# EAGLE board Spo2 PCB Layout (EAGLE 9.6.2)
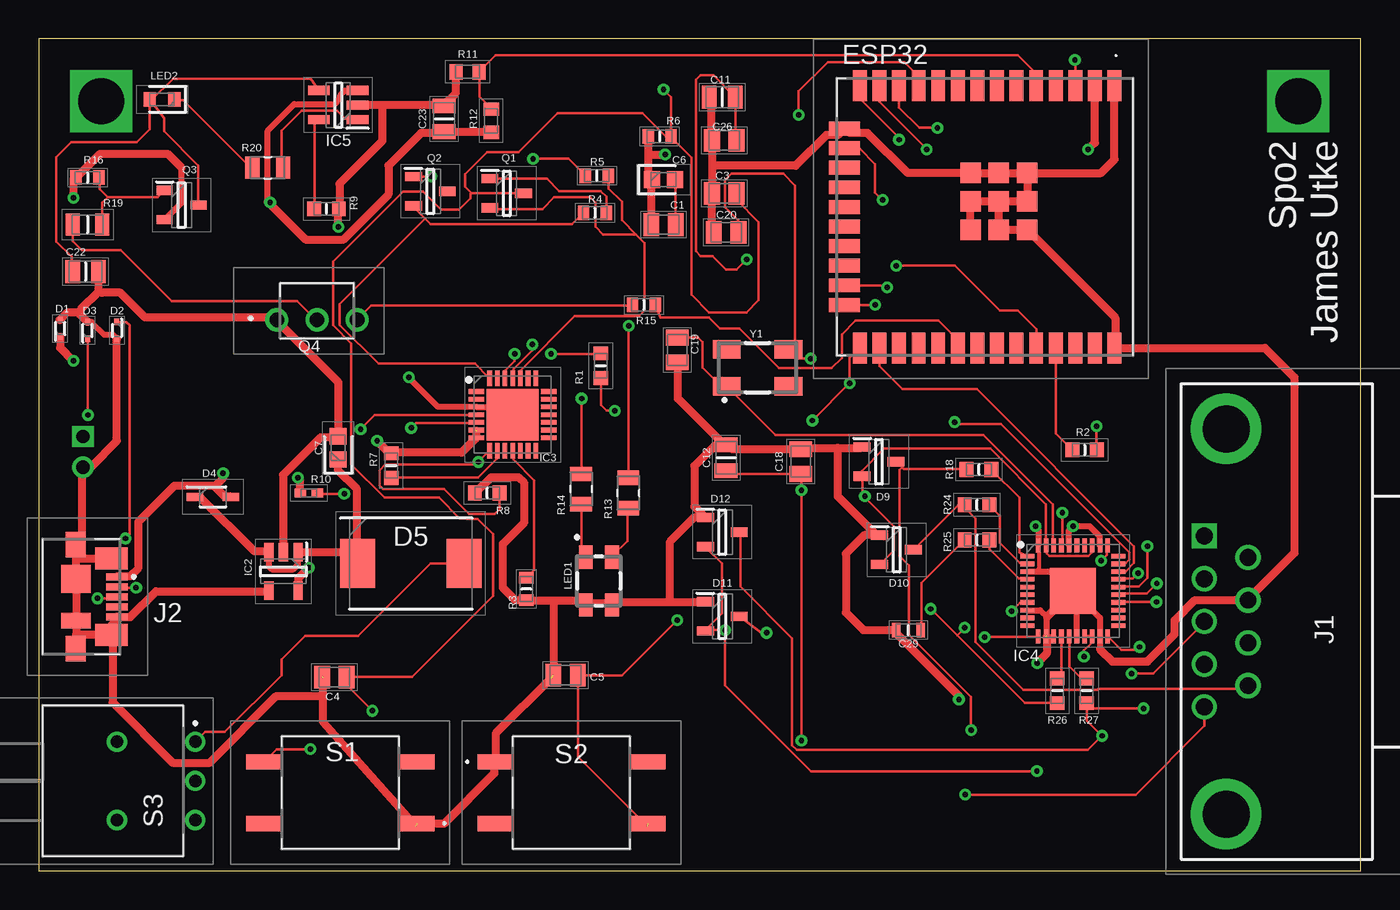
[diagram p0: board, top side]
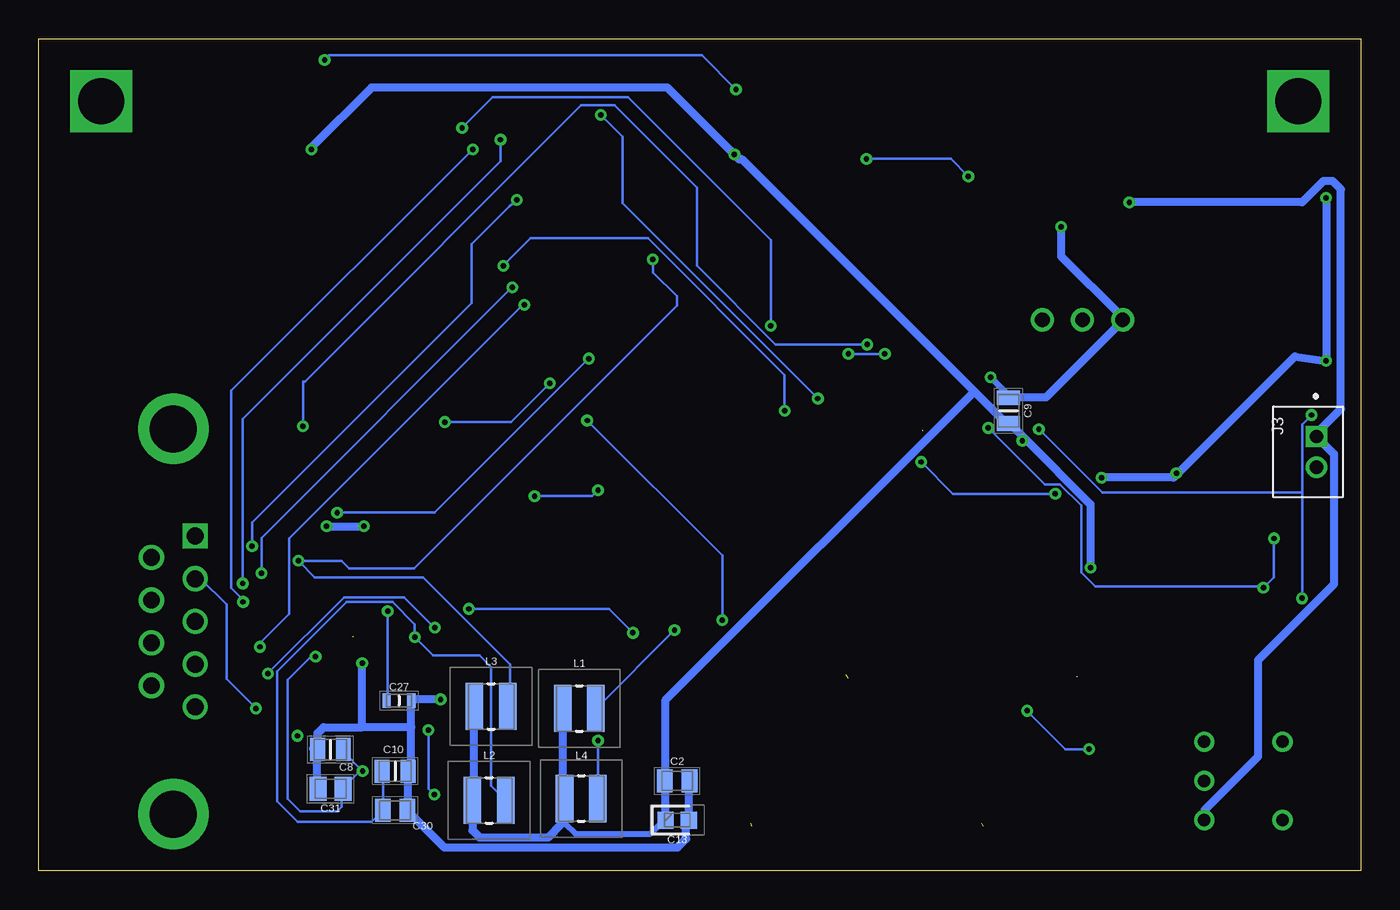
[diagram p1: board, bottom side, seen from below]

Size 85.72 x 53.98 mm. Coordinates in mm from the lower left corner, seen from the top.
Outline: 0,0 85.72,0 85.72,53.98 0,53.98 0,0
Copper layers (1*16): Top 0.035mm / dielectric 1.5mm / Bottom 0.035mm
Design rules "default": minimum track width 6mil, minimum drill 0.35mm, track to track 6mil, track to pad 6mil, pad to pad 6mil, via to via 6mil, smd to smd 6mil, copper to edge 40mil, drill to drill 6mil, minimum pad ring 10mil, minimum via ring 8mil, stop-mask expansion 4mil, vias tented up to drill 0mil, thermal gap 10mil
Net classes: 0 default: width 0.152 mm; 1 Power: width 0.508 mm

## Footprints (pad centres in the part's own frame; a part is rotated, then mirrored left to right if it is on the bottom)
CAPC2012X88N = smd 1.02 x 1.47: 1 -0.8,0; 2 0.8,0
CAPPC1609X90N = smd 1.05 x 1.1: 1 -0.75,0; 2 0.75,0
CAPC2114X145N@1 = smd 0.96 x 1.49: 1 -0.84,0; 2 0.84,0
CAPC2114X145N = smd 0.96 x 1.49: 1 -0.84,0; 2 0.84,0
CAPC2012X88N@1 = smd 1.02 x 1.47: 1 -0.8,0; 2 0.8,0
CAPC1608X80N = smd 0.54 x 0.94: 1 -0.8,0; 2 0.8,0
CAPC2012X100N = smd 1.1 x 1.57: 1 -0.81,0; 2 0.81,0
SODFL1006X40N = smd 0.43 x 0.32: 1 -0.55,0; 2 0.55,0
SOD2513X120N = smd 1.075 x 0.5: 1 -1.162,0; 2 1.162,0
DIOM8059X256N = smd 2.25 x 3.2: 1 -3.45,0; 2 3.45,0
SOT95P240X110-3N = smd 1.1 x 0.6: 1 -1.1,0.95; 2 -1.1,-0.95; 3 1.1,0
ESP32WROOM32DM113DH2800PH3Q0 = smd 2 x 0.9: 1 -8.5,8.41; 2 -8.5,7.14; 3 -8.5,5.87; 4 -8.5,4.6; 5 -8.5,3.33; 6 -8.5,2.06; 7 -8.5,0.79; 8 -8.5,-0.48; 9 -8.5,-1.75; 10 -8.5,-3.02; 11 -8.5,-4.29; 12 -8.5,-5.56; 13 -8.5,-6.83; 14 -8.5,-8.1; 25 8.5,-8.1; 26 8.5,-6.83; 27 8.5,-5.56; 28 8.5,-4.29; 29 8.5,-3.02; 30 8.5,-1.75; 31 8.5,-0.48; 32 8.5,0.79; 33 8.5,2.06; 34 8.5,3.33; 35 8.5,4.6; 36 8.5,5.87; 37 8.5,7.14; 38 8.5,8.41 | smd 0.9 x 2: 15 -5.715,-9.1; 16 -4.445,-9.1; 17 -3.175,-9.1; 18 -1.905,-9.1; 19 -0.635,-9.1; 20 0.635,-9.1; 21 1.905,-9.1; 22 3.175,-9.1; 23 4.445,-9.1; 24 5.715,-9.1 | smd 1.33 x 1.33: 39 -2.835,2.745; 40 -1,2.745; 41 0.835,2.745; 42 -2.835,0.91; 43 -1,0.91; 44 0.835,0.91; 45 -2.835,-0.925; 46 -1,-0.925; 47 0.835,-0.925
SOT95P282X130-5N = smd 1.2 x 0.6: 1 -1.25,0.95; 2 -1.25,0; 3 -1.25,-0.95; 4 1.25,-0.95; 5 1.25,0.95
QFN50P500X500X80-29N = smd 1 x 0.3: 1 -2.35,1.5; 2 -2.35,1; 3 -2.35,0.5; 4 -2.35,0; 5 -2.35,-0.5; 6 -2.35,-1; 7 -2.35,-1.5; 15 2.35,-1.5; 16 2.35,-1; 17 2.35,-0.5; 18 2.35,0; 19 2.35,0.5; 20 2.35,1; 21 2.35,1.5 | smd 0.3 x 1: 8 -1.5,-2.35; 9 -1,-2.35; 10 -0.5,-2.35; 11 0,-2.35; 12 0.5,-2.35; 13 1,-2.35; 14 1.5,-2.35; 22 1.5,2.35; 23 1,2.35; 24 0.5,2.35; 25 0,2.35; 26 -0.5,2.35; 27 -1,2.35; 28 -1.5,2.35 | smd 3.35 x 3.35: 29 0,0
QFN50P600X600X100-41N = smd 0.9 x 0.3: 1 -2.95,2.25; 2 -2.95,1.75; 3 -2.95,1.25; 4 -2.95,0.75; 5 -2.95,0.25; 6 -2.95,-0.25; 7 -2.95,-0.75; 8 -2.95,-1.25; 9 -2.95,-1.75; 10 -2.95,-2.25; 21 2.95,-2.25; 22 2.95,-1.75; 23 2.95,-1.25; 24 2.95,-0.75; 25 2.95,-0.25; 26 2.95,0.25; 27 2.95,0.75; 28 2.95,1.25; 29 2.95,1.75; 30 2.95,2.25 | smd 0.3 x 0.9: 11 -2.25,-2.95; 12 -1.75,-2.95; 13 -1.25,-2.95; 14 -0.75,-2.95; 15 -0.25,-2.95; 16 0.25,-2.95; 17 0.75,-2.95; 18 1.25,-2.95; 19 1.75,-2.95; 20 2.25,-2.95; 31 2.25,2.95; 32 1.75,2.95; 33 1.25,2.95; 34 0.75,2.95; 35 0.25,2.95; 36 -0.25,2.95; 37 -0.75,2.95; 38 -1.25,2.95; 39 -1.75,2.95; 40 -2.25,2.95 | smd 3 x 3: 41 0,0
SOT95P270X145-5N = smd 1.4 x 0.6: 1 -1.25,0.95; 2 -1.25,0; 3 -1.25,-0.95; 4 1.25,-0.95; 5 1.25,0.95
182009213R161 = drill 1.09 pad 1.635 square: 1 0,0 | drill 1.09 pad 1.635: 2 -2.77,0; 3 -5.54,0; 4 -8.31,0; 5 -11.08,0; 6 -1.385,-2.84; 7 -4.155,-2.84; 8 -6.925,-2.84; 9 -9.695,-2.84 | drill 3.05 pad 4.575: MH1 6.955,-1.42; MH2 -18.035,-1.42
473461001 = smd 0.45 x 1.38: 1 -1.3,1.903; 2 -0.65,1.903; 3 0,1.903; 4 0.65,1.903; 5 1.3,1.903 | smd 1.425 x 2.1: 6 2.487,1.544; 7 -2.487,1.544 | smd 1.8 x 1.9: 8 -1.15,-0.756 | smd 1 x 1.9: 9 1.55,-0.756 | smd 1.65 x 1.3: 10 -3.375,-0.756; 11 3.375,-0.756
JST_B2B-PH-K-S(LF)(SN) = drill 0.86 square: 1 1,-0.55 | drill 0.86: 2 -1,-0.55
LPS3010471MRC = smd 1.14 x 3.05: 1 -1.08,0; 2 1.08,0
SMD3528_1 = smd 1.5 x 0.9: 1 -1.55,-0.85; 2 -1.55,0.85; 3 1.55,-0.85; 4 1.55,0.85
LEDC1608X45N = smd 0.8 x 0.95: 1 -0.8,0; 2 0.8,0
SOT95P240X115-3N = smd 1.1 x 0.6: 1 -1.1,0.95; 2 -1.1,-0.95; 3 1.1,0
SOT95P230X110-3N = smd 1.05 x 0.6: 1 -1.1,0.95; 2 -1.1,-0.95; 3 1.1,0
BC33740TA = drill 0.96 pad 1.493: 1 -1.7,-0.585; 2 0.9,-0.585; 3 3.5,-0.585
RESC1608X55N = smd 0.9 x 0.95: 1 -0.8,0; 2 0.8,0
CAPC1608X55N = smd 0.74 x 0.94: 1 -0.74,0; 2 0.74,0
RESC1005X40N = smd 0.75 x 0.6: 1 -0.55,0; 2 0.55,0
RESC1608X50N = smd 0.85 x 1: 1 -0.75,0; 2 0.75,0
RESC2012X64N = smd 0.93 x 1.42: 1 -0.979,0; 2 0.979,0
RESC2012X60N = smd 0.9 x 1.45: 1 -0.95,0; 2 0.95,0
RESC2012X50N = smd 0.92 x 1.42: 1 -1,0; 2 1,0
15712943 = smd 2.2 x 1: 1 -5,2; 2 5,2; 3 -5,-2; 4 5,-2
AS11CH = drill 0.8 pad 1.3: 1 0,0; 2 2.54,0; 3 5.08,0; MH1 0,-5.08; MH2 5.08,-5.08
ABM3B = smd 1.8 x 1.2: 1 -2,-1.2; 2 2,-1.2; 3 2,1.2; 4 -2,1.2

## Placement (x,y rotation side)
C1  0.1uF  [CAPC2012X88N]  40.51,41.91 0 top
C2  0.1uF  [CAPC2012X88N]  44.32,5.84 0 bottom
C3  0.1uF  [CAPC2012X88N]  44.45,43.94 180 top
C4  0.1uF  [CAPC2012X88N]  19.18,12.57 180 top
C5  0.1uF  [CAPC2012X88N]  34.16,12.7 180 top
C6  22uF  [CAPPC1609X90N]  40.51,44.83 0 top
C7  22uF  [CAPPC1609X90N]  19.43,27.43 90 top
C8  10uF  [CAPC2114X145N@1]  66.8,7.87 180 bottom
C9  4.7uF  [CAPC2114X145N]  22.86,29.84 90 bottom
C10  10uF  [CAPC2114X145N@1]  62.61,6.48 0 bottom
C11  10uF  [CAPC2114X145N@1]  44.32,50.16 180 top
C12  10uF  [CAPC2114X145N@1]  44.58,26.8 90 top
C13  22uF  [CAPPC1609X90N]  44.32,3.3 0 bottom
C18  0.1uF  [CAPC2012X88N]  49.4,26.54 90 top
C19  22pF  [CAPC2012X88N@1]  41.4,33.78 270 top
C20  22pF  [CAPC2012X88N@1]  44.58,41.4 180 top
C22  4.7uF  [CAPC2114X145N]  3.05,38.86 0 top
C23  4.7uF  [CAPC2114X145N]  26.29,48.77 90 top
C26  0.1uF  [CAPC2012X88N]  44.45,47.37 180 top
C27  2.2uF  [CAPC1608X80N]  62.36,11.05 0 bottom
C29  2.2uF  [CAPC1608X80N]  56.39,15.62 180 top
C30  0.1uF  [CAPC2012X88N]  62.61,3.94 0 bottom
C31  1uF  [CAPC2012X100N]  66.8,5.33 180 bottom
D1  CPDQ5V0-HF  [SODFL1006X40N]  1.4,35.18 90 top
D2  CPDQ5V0-HF  [SODFL1006X40N]  5.08,35.05 270 top
D3  CPDQ5V0-HF  [SODFL1006X40N]  3.17,35.05 90 top
D4  BAT760-7  [SOD2513X120N]  11.3,24.26 0 top
D5  SS34  [DIOM8059X256N]  24.13,19.94 0 top
D9  BAT54S  [SOT95P240X110-3N]  54.48,26.54 0 top
D10  BAT54S  [SOT95P240X110-3N]  55.63,20.83 0 top
D11  BAT54S  [SOT95P240X110-3N]  44.32,16.51 0 top
D12  BAT54S  [SOT95P240X110-3N]  44.32,21.97 0 top
ESP32  ESP32-WROOM-32D_M113DH2800PH3Q  [ESP32WROOM32DM113DH2800PH3Q0]  61.34,42.42 270 top
IC2  AP2112K-3.3TRG1  [SOT95P282X130-5N]  15.88,19.43 270 top
IC3  CP2102N-A02-GQFN28  [QFN50P500X500X80-29N]  30.73,29.59 0 top
IC4  AFE4400RHAR  [QFN50P600X600X100-41N]  67.06,18.16 0 top
IC5  MCP73832T-2DFI_OT  [SOT95P270X145-5N]  19.43,49.66 180 top
J1  182-009-213R161  [182009213R161]  75.56,21.72 90 top
J2  47346-1001  [473461001]  3.17,17.78 270 top
J3  B2B-PH-K-S(LF)(SN)  [JST_B2B-PH-K-S(LF)(SN)]  3.43,27.18 90 bottom
L1  470nH  [LPS3010471MRC]  50.67,10.54 0 bottom
L2  470nH  [LPS3010471MRC]  56.52,4.57 0 bottom
L3  470nH  [LPS3010471MRC]  56.39,10.67 0 bottom
L4  470nH  [LPS3010471MRC]  50.55,4.7 0 bottom
LED1  150141RV73100  [SMD3528_1]  36.32,18.8 270 top
LED2  LTST-C193KRKT-5A  [LEDC1608X45N]  8,50.04 180 top
Q1  SS8050-G  [SOT95P240X115-3N]  30.35,43.94 0 top
Q2  SS8050-G  [SOT95P240X115-3N]  25.4,44.07 0 top
Q3  BSH205G2R  [SOT95P230X110-3N]  9.27,43.18 0 top
Q4  KSC1815YTA  [BC33740TA]  17.14,36.32 0 top
R1  0 Ohm  [RESC1608X55N]  36.45,32.77 90 top
R2  0 Ohm  [RESC1608X55N]  67.82,27.3 0 top
R3  10k  [CAPC1608X55N]  31.62,18.29 270 top
R4  10k  [CAPC1608X55N]  36.07,42.67 0 top
R5  10k  [CAPC1608X55N]  36.2,45.09 180 top
R6  10k  [CAPC1608X55N]  40.26,47.62 0 top
R7  2k  [RESC1608X55N]  22.86,26.29 90 top
R8  47.5K  [RESC1608X55N]  29.08,24.51 180 top
R9  2k  [RESC1608X55N]  18.67,42.93 180 top
R10  22.1K  [RESC1005X40N]  17.53,24.51 0 top
R11  100k  [RESC1608X50N]  27.81,51.82 180 top
R12  100k  [RESC1608X50N]  29.34,48.64 270 top
R13  65ohm  [RESC2012X64N]  38.23,24.51 90 top
R14  65ohm  [RESC2012X64N]  35.18,24.77 90 top
R15  10k  [CAPC1608X55N]  39.24,36.7 0 top
R16  10k  [CAPC1608X55N]  3.17,44.96 0 top
R18  0 Ohm  [RESC1608X55N]  60.96,26.04 180 top
R19  15k  [RESC2012X60N]  3.17,41.91 0 top
R20  576  [RESC2012X50N]  14.86,45.59 0 top
R24  0 Ohm  [RESC1608X55N]  60.83,23.75 180 top
R25  0 Ohm  [RESC1608X55N]  60.83,21.46 180 top
R26  0 Ohm  [RESC1608X55N]  66.04,11.68 270 top
R27  0 Ohm  [RESC1608X55N]  67.94,11.68 270 top
S1  1571294-3  [15712943]  19.56,5.08 180 top
S2  1571294-3  [15712943]  34.54,5.08 0 top
S3  AS11CH  [AS11CH]  10.16,8.38 270 top
Y1  ABM3B-8.000MHZ-10-1-U-T  [ABM3B]  46.61,32.64 0 top

## Library data of the parts
C1-C5 C18 C26 C30 = SamacSys_Parts; DESCRIPTION: Cap Ceramic 0.1uF 50V X7R 10% Pad SMD 0805 125C T/R; HEIGHT: 0.88mm; MANUFACTURER_NAME: Kemet; MANUFACTURER_PART_NUMBER: C0805C104K5RAC7411; MOUSER_PART_NUMBER: 80-C0805C104K5RACLR; MOUSER_PRICE-STOCK: https://www.mouser.co.uk/ProductDetail/KEMET/C0805C104K5RAC7411/?qs=jbRM9o5BbzPcVXF0wW9AYg%3D%3D
C6 C7 C13 = SamacSys_Parts; DESCRIPTION: 22uF F38 Series Conductive Polymer, Miniature, Undertab Solid Electrolytic Chip Capacitors; HEIGHT: 0.9mm; MANUFACTURER_NAME: AVX; MANUFACTURER_PART_NUMBER: F381A226MMAAXE; MOUSER_PART_NUMBER: 581-F381A226MMAAXE; MOUSER_PRICE-STOCK: https://www.mouser.co.uk/ProductDetail/AVX/F381A226MMAAXE?qs=gTYE2QTfZfQFi8JvXKXiKg%3D%3D
C8 C10-C12 = SamacSys_Parts; DESCRIPTION: Status Mass Production (Preferred) Capacitance 10 uF +/- 10 % Case Size (EIA/JIS) 0805/2012 Rated Voltage 25 V tan (max) 10 % Temperature Characteristic (EIA) X6S Operating Temp. Range (EIA) -55 to +105 High Temperature Loading (% Rated Voltage) 150 % Insulation Resistance (min) 100 MuF Dimension L 2.0 +0.20/-0.00 mm Dimension W 1.25 +0.20/-0.00 mm Dimension T 1.25 +0.20/-0.00 mm Dimension e 0.50 +/-0.25 mm RoHS Compliance (10 subst.) Yes REACH Compliance (205 subst.) Yes IEC62474 (Ver. D19; HEIGHT: 1.45mm; MANUFACTURER_NAME: TAIYO YUDEN; MANUFACTURER_PART_NUMBER: TMK212BC6106KG-T; MOUSER_PART_NUMBER: 963-TMK212BC6106KG-T; MOUSER_PRICE-STOCK: https://www.mouser.co.uk/ProductDetail/Taiyo-Yuden/TMK212BC6106KG-T/?qs=rI7uf1IzohRW7kV5WJ6mlg%3D%3D
C9 C22 C23 = SamacSys_Parts; DESCRIPTION: Taiyo Yuden JMK212B7475KGHT 4.7F MLCC 6.3V dc +/-10% Tolerance SMD; HEIGHT: 1.45mm; MANUFACTURER_NAME: TAIYO YUDEN; MANUFACTURER_PART_NUMBER: JMK212B7475KGHT; MOUSER_PART_NUMBER: 963-JMK212B7475KGHT; MOUSER_PRICE-STOCK: https://www.mouser.co.uk/ProductDetail/Taiyo-Yuden/JMK212B7475KGHT/?qs=vmHwEFxEFR9NgetR%2FORAvw%3D%3D
C19 C20 = SamacSys_Parts; DESCRIPTION: Multilayer Ceramic Capacitors MLCC - SMD/SMT 100V 22pF X8R 0805 10%; HEIGHT: 0.88mm; MANUFACTURER_NAME: Kemet; MANUFACTURER_PART_NUMBER: C0805C220K1HACTU; MOUSER_PART_NUMBER: 80-C0805C220K1HACTU; MOUSER_PRICE-STOCK: https://www.mouser.co.uk/ProductDetail/KEMET/C0805C220K1HACTU/?qs=W0yvOO0ixfHaPTgNXyVDyQ%3D%3D
C27 C29 = SamacSys_Parts; DESCRIPTION: Multilayer Ceramic Capacitors MLCC - SMD/SMT 0603 16VDC 2.2uF 10% X7S; HEIGHT: 0.8mm; MANUFACTURER_NAME: TDK; MANUFACTURER_PART_NUMBER: C1608X7S1C225K080AE; MOUSER_PART_NUMBER: 810-C1608X7S1C225K08; MOUSER_PRICE-STOCK: https://www.mouser.co.uk/ProductDetail/TDK/C1608X7S1C225K080AE/?qs=zW32dvEIR3tqedNHz865EA%3D%3D
C31 = SamacSys_Parts; DESCRIPTION: Multilayer Ceramic Capacitors MLCC - SMD/SMT 10V 1uF X7R 0805 10% Flex; HEIGHT: 1mm; MANUFACTURER_NAME: Kemet; MANUFACTURER_PART_NUMBER: C0805X105K8RAC7210; MOUSER_PART_NUMBER: 80-C0805X105K8RACLR; MOUSER_PRICE-STOCK: https://www.mouser.co.uk/ProductDetail/KEMET/C0805X105K8RAC7210?qs=ds50AKTGxA8Ac4j4qbsB5A%3D%3D
D1-D3 = SamacSys_Parts; DESCRIPTION: ESD Suppressors / TVS Diodes SMD ESD Diode 5V Bi-Direction; HEIGHT: 0.4mm; MANUFACTURER_NAME: Comchip Technology; MANUFACTURER_PART_NUMBER: CPDQ5V0-HF; MOUSER_PART_NUMBER: 750-CPDQ5V0-HF; MOUSER_PRICE-STOCK: https://www.mouser.co.uk/ProductDetail/Comchip-Technology/CPDQ5V0-HF/?qs=ccyN4P6STah119k8k5VB0Q%3D%3D
D4 = SamacSys_Parts; DESCRIPTION: Diode Schottky 30V 1A 2Pin SOD323 Diodes Inc BAT760-7, SMT Schottky Diode, 30V 1A, 2-Pin SOD-323; HEIGHT: 1.2mm; MANUFACTURER_NAME: Diodes Inc.; MANUFACTURER_PART_NUMBER: BAT760-7; MOUSER_PART_NUMBER: 621-BAT760-7; MOUSER_PRICE-STOCK: https://www.mouser.co.uk/ProductDetail/Diodes-Incorporated/BAT760-7?qs=JV7lzlMm3yKDDyO09xoRbQ%3D%3D
D5 = SamacSys_Parts; DESCRIPTION: ON Semi SS34 SMT Schottky Diode, 40V 3A, 2-Pin DO-214AB; HEIGHT: 2.56mm; MANUFACTURER_NAME: ON Semiconductor; MANUFACTURER_PART_NUMBER: SS34; MOUSER_PART_NUMBER: 512-SS34; MOUSER_PRICE-STOCK: https://www.mouser.co.uk/ProductDetail/ON-Semiconductor-Fairchild/SS34?qs=2ONuHmP%2FXzb3ub11UdFfdQ%3D%3D
D9-D12 = SamacSys_Parts; DESCRIPTION: Schottky Diodes & Rectifiers SOT23 0.2A 30V Schot tky Dblr; HEIGHT: 1.1mm; MANUFACTURER_NAME: Rectron; MANUFACTURER_PART_NUMBER: BAT54S; MOUSER_PART_NUMBER: 583-BAT54S; MOUSER_PRICE-STOCK: https://www.mouser.co.uk/ProductDetail/Rectron/BAT54S/?qs=7pEAo90IqNGRiqD7TkybWA%3D%3D
ESP32 = SamacSys_Parts; DESCRIPTION: WiFi Modules (802.11) SMD Module, ESP32-D0WD, 32Mbits SPI flash, UART mode, PCB antenna; HEIGHT: 3.2mm; MANUFACTURER_NAME: Espressif Systems; MANUFACTURER_PART_NUMBER: ESP32-WROOM-32D(M113DH2800PH3Q0); MOUSER_PART_NUMBER: 356-ES32WROOM32D16MB; MOUSER_PRICE-STOCK: https://www.mouser.co.uk/ProductDetail/Espressif-Systems/ESP32-WROOM-32DM113DH2800PH3Q0/?qs=W%2FMpXkg%252BdQ75%2Fda1rSxxJw%3D%3D
IC2 = SamacSys_Parts; DESCRIPTION: 600mA 3.3V LDO Regulator Enable SOT23-5 DiodesZetex AP2112K-3.3TRG1, LDO Voltage Regulator, 3.3 V +/-1.5%, 2.5 6 Vin, 5-Pin SOT-23; HEIGHT: 1.3mm; MANUFACTURER_NAME: Diodes Inc.; MANUFACTURER_PART_NUMBER: AP2112K-3.3TRG1; MOUSER_PART_NUMBER: 621-AP2112K-3.3TRG1; MOUSER_PRICE-STOCK: https://www.mouser.co.uk/ProductDetail/Diodes-Incorporated/AP2112K-33TRG1/?qs=x6A8l6qLYDDPYHosCdzh%2FA%3D%3D
IC3 = SamacSys_Parts; DESCRIPTION: SILICON LABS - CP2102N-A02-GQFN28 - USB TO UART BRIDGE, -40 TO 85DEG C; HEIGHT: 0.8mm; MANUFACTURER_NAME: Silicon Labs; MANUFACTURER_PART_NUMBER: CP2102N-A02-GQFN28; MOUSER_PART_NUMBER: 634-CP2102NA02GQFN28; MOUSER_PRICE-STOCK: https://www.mouser.co.uk/ProductDetail/Silicon-Labs/CP2102N-A02-GQFN28/?qs=u16ybLDytRaSBkSkyjYFiA%3D%3D
IC4 = SamacSys_Parts; DESCRIPTION: Integrated Analog Front End (AFE) for Heart-Rate Monitors and Low-Cost Pulse Oximeters; HEIGHT: 1mm; MANUFACTURER_NAME: Texas Instruments; MANUFACTURER_PART_NUMBER: AFE4400RHAR; MOUSER_PART_NUMBER: 595-AFE4400RHAR; MOUSER_PRICE-STOCK: https://www.mouser.co.uk/ProductDetail/Texas-Instruments/AFE4400RHAR/?qs=MURVExHfc2zl%2FM9SqCv0pw%3D%3D
IC5 = SamacSys_Parts; DESCRIPTION: Battery Management 4.2V Li-Ion/Li-Poly Chrg mgnt controller; HEIGHT: 1.45mm; MANUFACTURER_NAME: Microchip; MANUFACTURER_PART_NUMBER: MCP73832T-2DFI/OT; MOUSER_PART_NUMBER: 579-MCP73832T2DFI/OT; MOUSER_PRICE-STOCK: https://www.mouser.co.uk/ProductDetail/Microchip-Technology/MCP73832T-2DFI-OT?qs=Of9BA0M78V%2Fd7MaXZyVc5w%3D%3D
J1 = SamacSys_Parts; DESCRIPTION: D-Sub Standard Connectors 9P Fem R/A inside ground straps; HEIGHT: 12.7mm; MANUFACTURER_NAME: NorComp; MANUFACTURER_PART_NUMBER: 182-009-213R161
J2 = SamacSys_Parts; DESCRIPTION: MOLEX - 47346-1001 - MULTIPOLE CONNECTOR; HEIGHT: 2.94mm; MANUFACTURER_NAME: Molex; MANUFACTURER_PART_NUMBER: 47346-1001; MOUSER_PART_NUMBER: 538-47346-1001; MOUSER_PRICE-STOCK: https://www.mouser.co.uk/ProductDetail/Molex/47346-1001/?qs=yd8XiKYcH9muPqUKe4E0Dw%3D%3D
J3 = B2B-PH-K-S_LF__SN_; DESCRIPTION: Connector Header Through Hole 2 position 0.079 (2.00mm); DIGI-KEY_PART_NUMBER: 455-1704-ND; MF: JST Sales; MP: B2B-PH-K-S(LF)(SN); PACKAGE: None; PURCHASE-URL: https://pricing.snapeda.com/search/part/B2B-PH-K-S(LF)(SN)/?ref=eda
L1-L4 = SamacSys_Parts; DESCRIPTION: Fixed Inductors 470nH Shld 1.8A 70 mOhms AECQ2; HEIGHT: 1mm; MANUFACTURER_NAME: COILCRAFT; MANUFACTURER_PART_NUMBER: LPS3010-471MRC
LED1 = SamacSys_Parts; DESCRIPTION: LED,Wurth Elektronik,150141RV73100 Wurth Elektronik 150141RV73100, WL-SBTW Series Bi-colour Green, Red LED, 572 / 625 nm 4-Pin 3528 (1411), Round Lens; HEIGHT: mm; MANUFACTURER_NAME: Wurth Elektronik; MANUFACTURER_PART_NUMBER: 150141RV73100; MOUSER_PART_NUMBER: 710-150141RV73100; MOUSER_PRICE-STOCK: https://www.mouser.co.uk/ProductDetail/Wurth-Elektronik/150141RV73100?qs=LlUlMxKIyB1w9QlMugtMLA%3D%3D
LED2 = SamacSys_Parts; DESCRIPTION: Lite-On LTST-C193KRKT-5A, 631 nm Red LED, 1608 (0603) SMD package; HEIGHT: 0.45mm; MANUFACTURER_NAME: Lite-On; MANUFACTURER_PART_NUMBER: LTST-C193KRKT-5A; MOUSER_PART_NUMBER: 859-LTSTC193KRKT5A; MOUSER_PRICE-STOCK: https://www.mouser.co.uk/ProductDetail/Lite-On/LTST-C193KRKT-5A/?qs=xIkB7y1OTor17kZSHyF5tQ%3D%3D
Q1 Q2 = SamacSys_Parts; DESCRIPTION: Bipolar Transistors - BJT NPN TRANSISTOR 1.5A 40V; HEIGHT: 1.15mm; MANUFACTURER_NAME: Comchip Technology; MANUFACTURER_PART_NUMBER: SS8050-G; MOUSER_PART_NUMBER: 750-SS8050-G; MOUSER_PRICE-STOCK: https://www.mouser.co.uk/ProductDetail/Comchip-Technology/SS8050-G/?qs=LLUE9lz1YbcHg%252BWLMAtcrQ%3D%3D
Q3 = SamacSys_Parts; DESCRIPTION: MOSFET 20V P-channel Trench MOSFET; HEIGHT: 1.1mm; MANUFACTURER_NAME: Nexperia; MANUFACTURER_PART_NUMBER: BSH205G2R; MOUSER_PART_NUMBER: 771-BSH205G2R; MOUSER_PRICE-STOCK: https://www.mouser.co.uk/ProductDetail/Nexperia/BSH205G2R?qs=%252BRKXB2WKlScNIfK4SlBmFA%3D%3D
Q4 = SamacSys_Parts; DESCRIPTION: Transistor, Fairchild, KSC1815YTA; HEIGHT: mm; MANUFACTURER_NAME: ON Semiconductor; MANUFACTURER_PART_NUMBER: KSC1815YTA; MOUSER_PART_NUMBER: 512-KSC1815YTA; MOUSER_PRICE-STOCK: https://www.mouser.co.uk/ProductDetail/ON-Semiconductor-Fairchild/KSC1815YTA?qs=ljbEvF4DwOP9FJQWOCoFLQ%3D%3D
R1 R2 R18 R24-R27 = SamacSys_Parts; DESCRIPTION: Thick Film Resistors - SMD ResA 0603 0R Jumper 100mW AEC-Q200; HEIGHT: 0.55mm; MANUFACTURER_NAME: Bourns; MANUFACTURER_PART_NUMBER: CR0603AJ/-000ELF; MOUSER_PART_NUMBER: 652-CR0603AJ/-000ELF; MOUSER_PRICE-STOCK: https://www.mouser.co.uk/ProductDetail/Bourns/CR0603AJ-000ELF/?qs=GedFDFLaBXF8EepoWODZMQ%3D%3D
R3-R6 R15 R16 = SamacSys_Parts; DESCRIPTION: Thick Film Resistors - SMD 10000Ohms 5% 0603 TCR=100 AEC-Q200; HEIGHT: 0.55mm; MANUFACTURER_NAME: KOA Speer; MANUFACTURER_PART_NUMBER: HV73V1JTTD103J; MOUSER_PART_NUMBER: 660-HV73V1JTTD103J; MOUSER_PRICE-STOCK: https://www.mouser.co.uk/ProductDetail/KOA-Speer/HV73V1JTTD103J?qs=xZ%2FP%252Ba9zWqbXuiWLWua7%2Fw%3D%3D
R7 R9 = SamacSys_Parts; DESCRIPTION: Anti-Sulfurated Thick Film Chip Resistors / Anti-Surge Type; HEIGHT: 0.55mm; MANUFACTURER_NAME: Panasonic; MANUFACTURER_PART_NUMBER: ERJ-UP3F2001V
R8 = SamacSys_Parts; DESCRIPTION: Thick Film Resistors - SMD AEC-Q200; HEIGHT: 0.55mm; MANUFACTURER_NAME: Panasonic; MANUFACTURER_PART_NUMBER: ERJ-UP3F4752V; MOUSER_PART_NUMBER: 667-ERJ-UP3F4752V; MOUSER_PRICE-STOCK: https://www.mouser.co.uk/ProductDetail/Panasonic/ERJ-UP3F4752V?qs=GedFDFLaBXGUd1E4zR%252BF8g%3D%3D
R10 = SamacSys_Parts; DESCRIPTION: Thick Film Resistors - SMD 0402 Resistor 0.5% 50ppm 22.1KOhm; HEIGHT: 0.4mm; MANUFACTURER_NAME: Panasonic; MANUFACTURER_PART_NUMBER: ERJ-2RHD2212X; MOUSER_PART_NUMBER: 667-ERJ-2RHD2212X; MOUSER_PRICE-STOCK: https://www.mouser.co.uk/ProductDetail/Panasonic/ERJ-2RHD2212X?qs=pfd5qewlna6lhy494ElLrw%3D%3D
R11 R12 = SamacSys_Parts; DESCRIPTION: RCG0603100KJNEA; HEIGHT: 0.5mm; MANUFACTURER_NAME: Vishay; MANUFACTURER_PART_NUMBER: RCG0603100KJNEA; MOUSER_PART_NUMBER: 71-RCG0603100KJNEA; MOUSER_PRICE-STOCK: https://www.mouser.com/Search/Refine.aspx?Keyword=71-RCG0603100KJNEA
R13 R14 = Y402265R0000A9W; DESCRIPTION: 65 Ohms ±0.05% 0.2W, 1/5W Chip Resistor 0805 (2012 Metric) Moisture Resistant, Non-Inductive Metal Foil; DIGI-KEY_PART_NUMBER: Y402265R0000A9W-ND; MF: Vishay; MP: Y402265R0000A9W; PACKAGE: 2012 Vishay
R19 = SamacSys_Parts; DESCRIPTION: Thick Film Resistors - SMD 1/8Watt 15Kohms 1% Commercial Use; HEIGHT: 0.6mm; MANUFACTURER_NAME: Vishay; MANUFACTURER_PART_NUMBER: CRCW080515K0FKEBC; MOUSER_PART_NUMBER: 71-CRCW080515K0FKEBC; MOUSER_PRICE-STOCK: https://www.mouser.co.uk/ProductDetail/Vishay-Dale/CRCW080515K0FKEBC?qs=wd5RIQLrsJhoqkW23VWcpg%3D%3D
R20 = CRCW0805576RFKEA; DESCRIPTION: 576 Ohms ±1% 0.125W, 1/8W Chip Resistor 0805 (2012 Metric) Automotive AEC-Q200 Thick Film; DIGI-KEY_PART_NUMBER: 541-576CCT-ND; MF: Vishay; MP: CRCW0805576RFKEA; PACKAGE: 2012 Vishay; PURCHASE-URL: https://pricing.snapeda.com/search/part/CRCW0805576RFKEA/?ref=eda
S1 S2 = SamacSys_Parts; DESCRIPTION: SWITCH,TACT,SMT,SEALED; HEIGHT: 5.5mm; MANUFACTURER_NAME: TE Connectivity; MANUFACTURER_PART_NUMBER: 1571294-3; MOUSER_PART_NUMBER: 506-1571294-3; MOUSER_PRICE-STOCK: https://www.mouser.co.uk/ProductDetail/TE-Connectivity-PB/1571294-3/?qs=bkeGI61iuy0TyJA2A0%2FQXg%3D%3D
S3 = SamacSys_Parts; DESCRIPTION: Switch Slide ON None OFF SPST Side Slide 0.1A 28VAC 28VDC 0.4VA 50000Cycles PC Pins Bracket Mount/Through Hole; HEIGHT: 6.18mm; MANUFACTURER_NAME: NKK Switches; MANUFACTURER_PART_NUMBER: AS11CH; MOUSER_PART_NUMBER: 633-AS11CH; MOUSER_PRICE-STOCK: https://www.mouser.co.uk/ProductDetail/NKK-Switches/AS11CH?qs=MODAV37v1mC%2FcDng1K%2FMsg%3D%3D
Y1 = SamacSys_Parts; DESCRIPTION: Abracon 8MHz Crystal +/-10ppm 4-SMD, No Lead 5 x 3 x 1.1mm; HEIGHT: mm; MANUFACTURER_NAME: ABRACON; MANUFACTURER_PART_NUMBER: ABM3B-8.000MHZ-10-1-U-T; MOUSER_PART_NUMBER: 815-ABM3B8MHZ101UT; MOUSER_PRICE-STOCK: https://www.mouser.co.uk/ProductDetail/ABRACON/ABM3B-8000MHZ-10-1-U-T?qs=axzvp2Rdp5%252B1td01iPkwcw%3D%3D

## Nets
0: C1.2 C6.2
!ADC_RESET: C5.1 ESP32.25 IC4.29 S2.4
!AFE_PDN: ESP32.24 IC4.20
+3V3: C1.1 C2.1 C6.1 C9.1 C13.1 ESP32.2 IC2.5 IC3.6 IC3.7 L1.1 L2.1 L3.1 L4.1 R6.1 R7.2
+5V: C7.1 D4.1 D5.1 IC2.1 IC2.3
+5V/1: D1.1 D4.2 J2.1 Q3.2 R10.1 R16.1
ADC_RDY: ESP32.26 IC4.28
BAT+: C23.1 IC5.3 J3.1 R12.2 S3.3
CTS: IC3.23
DCD: IC3.1
DIAG_END: IC4.21
DSR: IC3.27
DTR: IC3.28 Q2.2 R4.1
EN: C3.1 C4.1 ESP32.3 Q1.3 R6.2 S1.4
EN_CHARGE: ESP32.30 R15.2
GND: C2.2 C3.2 C4.2 C5.2 C7.2 C8.2 C9.2 C10.2 C11.2 C12.2 C13.2 C18.2 C19.2 C20.2 C22.2 C23.2 C26.2 C27.2 C29.2 C30.2 C31.2 D1.2 D2.2 D3.2 D9.1 D10.1 D11.1 D12.1 ESP32.1 ESP32.15 ESP32.38 ESP32.39 ESP32.40 ESP32.41 ESP32.42 ESP32.43 ESP32.44 ESP32.45 ESP32.46 ESP32.47 IC2.2 IC2.4 IC3.3 IC3.29 IC4.3 IC4.8 IC4.12 IC4.13 IC4.16 IC4.19 IC4.32 IC4.36 IC4.40 IC4.41 IC5.2 J1.7 J2.5 J2.6 J2.7 J2.8 J2.9 J2.10 J2.11 J3.2 LED1.3 LED1.4 Q4.1 R3.2 R8.2 R9.1 R11.2 S1.1 S2.1
GREENLED: ESP32.12 R13.2
INN: D9.3 J1.5 R18.2
INP: D10.3 J1.9 R24.2
IO0: Q2.3
LED_ALM: IC4.22
LED_DRV_SUP: C8.1 C31.1 D11.2 D12.2 IC4.17 IC4.18 L1.2
N$1: LED1.2 R13.1
N$2: LED1.1 R14.1
N$3: C19.1 IC4.38 Y1.1
N$4: Q1.1 R4.2
N$5: Q2.1 R5.2
N$6: IC5.5 R9.2
N$7: C20.1 IC4.37 Y1.3
N$8: C27.1 IC4.7
N$9: IC4.1 R18.1
N$10: IC4.2 R24.1
N$11: IC4.14 R26.1
N$12: C29.1 R25.2
N$13: IC4.15 R27.1
N$14: Q4.3 R15.1
N$15: Q4.2 R19.1
N$16: IC3.11 R3.1
N$17: IC3.9 R7.1
N$18: IC3.8 R8.1 R10.2
N$19: LED2.1 R20.1
N$20: D5.2 S3.1
N$25: Q3.1 R16.2 R19.2
N$26: IC5.1 R20.2
N$28: C22.1 IC5.4 LED2.2 Q3.3
PD_ALM: IC4.23
R1: IC3.2
REDLED: ESP32.11 R14.2
RTS: IC3.24 Q1.2 R5.1
RX_ANA_SUP: C12.1 C18.1 D9.2 D10.2 IC4.33 IC4.39 L4.2
RX_DIG_SUP: C11.1 C26.1 IC4.31 L3.2
RXD: IC3.25 R2.2
RXD0: ESP32.34 R1.1
SENSOR_VN: ESP32.5 R11.1 R12.1
SPI_CS0: ESP32.23 IC4.27
SPI_MISO: ESP32.14 IC4.25
SPI_MOSI: ESP32.16 IC4.26
SPI_SCK: ESP32.13 IC4.24
TX_CTRL_SUP: C10.1 C30.1 IC4.11 L2.2
TXD: IC3.26 R1.2
TXD0: ESP32.35 R2.1
TXN: D11.3 J1.3 R26.2
TXP: D12.3 J1.2 R27.2
USB_DN: D2.1 IC3.5 J2.2
USB_DP: D3.1 IC3.4 J2.3
VCM: IC4.4 R25.1

## Tracks (layer width: path | path; a pad name or v marks a point on that pad's centre or on a via)
0
  Top 0.152: C6.2 41.3,44.81 C1.2
!ADC_RESET  (via drill 0.35)  (1 unrouted)
  Top 0.152: v59.38,29.11 59.51,28.98 62.38,28.98 70.71,20.65 70.71,20.19 70.48,19.96 70.03,19.96 IC4.29 | ESP32.25 52.58,33.26 v52.58,31.62 v50.16,29.21 | 39.47,2.9 34.98,7.39 34.98,12.65 34.97,12.68 | 34.97,12.68 C5.1 | v41.4,16.26 37.83,12.68 34.97,12.68
  Bottom 0.152: v59.38,29.11 55.09,29.11 v52.58,31.62 | v50.16,29.21 41.4,20.45 v41.4,16.26
!AFE_PDN  (via drill 0.35)
  Top 0.152: IC4.20 70.19,14.32 71.17,14.32 v71.37,14.53 | ESP32.24 52.27,36.68 54.2,36.68 v54.23,36.7
  Bottom 0.152: v71.37,14.53 71.37,14.78 69.49,16.66 69.49,21.57 54.36,36.7 v54.23,36.7
+3V3  (via drill 0.35)  (1 unrouted)
  Top 0.508: v17.53,19.66 16.84,18.97 16.84,18.21 IC2.5 | v21.95,27.89 22.63,27.2 R7.2 22.86,27.13 27.43,27.13 28.35,28.04 IC3.7 28.38,28.54 | 39.55,46.46 39.55,45.03 39.7,44.88 C6.1 39.7,44.58 C1.1 | 39.55,46.46 39.55,47.62 R6.1 | 39.55,46.46 v40.62,46.46 | 68.43,50.85 ESP32.2 68.48,47.22 v68.05,46.79
  Bottom 0.381: 51.59,4.12 51.59,3.07 50.93,2.41 46.05,2.41 45.11,3.35
  Bottom 0.508: L2.1 57.53,4.57 57.53,10.67 L3.1 | C13.1 45.11,3.35 45.11,5.79 C2.1 45.11,6.1 45.11,11.05 25.07,31.09 | 51.59,4.12 51.59,4.65 L4.1 | L1.1 51.74,10.52 51.74,4.88 L4.1 | 57.45,3.43 57.45,4.34 L2.1 | L4.1 51.82,4.04 51.82,3.05 52.68,2.18 57.15,2.18 57.59,2.63 L2.1 | v17.53,19.66 17.53,23.77 21.79,28.04 | 21.79,28.04 22.71,28.96 22.86,28.96 C9.1 23.09,29.11 25.07,31.09 | v21.95,27.89 21.79,28.04 | 25.07,31.09 40.16,46.18 40.29,46.13 v40.62,46.46 44.96,50.8 64.14,50.8 68.05,46.89 v68.05,46.79
+5V
  Top 0.381: IC2.3 14.93,19.75 15.11,19.56 16.51,19.56 16.8,19.85 16.8,19.96 16.82,19.98 IC2.1
  Top 0.508: D4.1 10.21,24.23 10.49,24.23 13.99,20.73 14.86,20.73 IC2.3 | C7.1 19.43,25.98 20.65,24.77 20.65,19.96 D5.1 20.42,20.65 17.07,20.65 IC2.1
+5V/1  (via drill 0.35)
  Top 0.381: Q3.2 9.27,43.33 9.27,45.59
  Top 0.508: 11.43,24.92 11.35,24.99 8.81,24.99 6.48,22.66 6.48,19.66 5.94,19.13 5.11,19.13 J2.1 | 11.43,24.92 12.04,24.31 12.42,24.31 D4.2 | v2.26,33.07 1.4,33.93 D1.1 | v2.26,43.64 2.26,44.86 2.36,44.96 R16.1 2.59,45.11 3.99,46.51 8.36,46.51 9.27,45.59 | v16.82,25.5 16.92,25.4 16.92,24.54 R10.1 | v11.96,25.78 11.96,25.45 11.43,24.92
  Bottom 0.508: v2.26,43.64 v2.26,33.07 4.28,33.36 11.91,25.73 | v16.82,25.5 12.14,25.5 11.91,25.73 | 11.91,25.73 v11.96,25.78
ADC_RDY
  Top 0.152: IC4.28 70.03,19.43 70.48,19.43 71.02,19.96 71.02,21.06 60.83,31.24 56.01,31.24 54.51,32.74 ESP32.26
BAT+  (via drill 0.35)
  Top 0.381: 14.86,43.41 14.86,48.01 16.57,49.72 19.18,49.72 19.56,50.1 19.56,50.29 19.87,50.61 IC5.3
  Top 0.508: R12.2 29.34,47.93 C23.1 26.06,47.85 24.79,47.85 22.68,45.74 22.68,43.87 19.74,40.92 17.35,40.92 14.86,43.41 14.86,43.36 v15.01,43.36
  Bottom 0.508: S3.3 10.13,3.35 10.13,3.96 6.68,7.42 6.68,13.66 1.75,18.59 1.75,27.05 2.82,28.12 J3.1 2.82,28.42 1.29,29.95 1.29,44.2 1.83,44.73 2.44,44.73 3.81,43.36 v15.01,43.36
DTR
  Top 0.152: R4.1 34.59,41.94 25.43,41.94 25.07,42.29 | 25.07,42.29 24.31,43.05 Q2.2 | 25.07,42.29 19.53,36.75 19.53,35.41 22.05,32.89 28.3,32.89 29.18,32 IC3.28
EN  (via drill 0.35)
  Top 0.152: v21.64,10.39 19.96,12.06 19.96,12.57 C4.1 24.21,12.57 29.46,17.83 29.46,21.84 28.47,22.84 27.79,22.84 27.76,22.86 27.3,22.86 25.96,24.21 22.43,24.21 20.27,26.36 20.27,34.21 19.1,35.38 19.1,39.52 23.62,44.04 24.92,44.04 26.09,42.88 27.25,42.88 28,43.62 28,43.9 28.07,43.97 | v17.63,7.9 15.44,7.9 14.63,7.09 S1.4 14.55,7.01 | R6.2 40.69,47.62 39.17,49.15 33.66,49.15 31.11,46.61 29.08,46.61 27.66,45.19 27.66,44.37 28.07,43.97 | 28.07,43.97 31.39,43.97 Q1.3 | R6.2 41,47.57 42.32,46.25 42.32,37.36 43.46,36.22 45.9,36.22 46.69,37.01 46.69,42.09 45.26,43.51 45.26,43.89 C3.1 | v40.51,50.67 41,50.19 R6.2 | v67.18,52.58 67.21,52.55 ESP32.3
  Bottom 0.152: v21.64,10.39 19.15,7.9 v17.63,7.9 | v67.18,52.58 66.88,52.88 42.72,52.88 v40.51,50.67
EN_CHARGE
  Top 0.152: R15.2 40.34,35.89 43.46,35.89 44.17,35.18 45.44,35.18 48.01,32.61 51.41,32.61 52.07,33.27 52.07,34.8 52.96,35.69 58.33,35.69 59.59,34.42 59.59,33.93 ESP32.30
GND  (via drill 0.35)  (5 unrouted)
  Top 0.254: IC4.40 64.81,20.71 64.83,20.68 64.83,19.6 65.02,19.41 | IC4.41 67.04,18.16
  Top 0.381: v24,32 25.92,30.09 IC3.3 30.23,30.09 IC3.29 | IC4.3 65.02,19.41 65.79,19.41 67.04,18.16 | IC4.8 64.93,16.91 65.38,16.46 65.38,15.29 IC4.12 | IC4.16 67.31,17.91 IC4.41 68.81,16.41 IC4.19 68.81,14.38 | IC4.36 66.81,22.1 v67.06,22.35 68.15,22.35 68.8,21.7 IC4.32 | v64.64,22.35 64.81,22.19 IC4.40 | IC4.13 65.75,15.15 65.36,15.15 | D2.2 4.83,34.76 4.28,34.76 3.43,35.6 D3.2
  Top 0.508: C20.2 43.74,41.45 43.66,41.53 43.66,43.89 C3.2 43.66,44.2 43.66,45.72 | C11.2 43.51,50.14 43.59,50.06 43.59,47.4 C26.2 43.66,47.17 43.66,45.72 | 69.85,50.82 ESP32.1 69.75,46.13 68.88,45.25 ESP32.39 | 65.38,16.46 67.06,18.14 IC4.41 | 2.44,15.32 2.44,16.15 J2.9 2.44,16.46 2.44,18.67 J2.8 2.44,18.97 2.44,20.27 | 2.44,15.32 2.44,14.48 J2.11 | 5.11,16.46 5.94,16.46 7.62,18.14 14.86,18.14 IC2.4 | 5.11,16.46 J2.5 | J2.6 4.72,15.32 4.72,15.93 5.03,16.23 5.11,16.46 | 2.44,15.32 4.5,15.32 J2.6 | 2.67,36.2 1.83,36.2 1.37,35.74 D1.2 | 3.89,37.57 C22.2 | 3.89,37.57 2.74,36.42 2.67,36.2 | 2.44,20.27 2.44,21.11 J2.10 2.59,21.34 2.82,21.57 2.82,26.14 J3.2 3.37,26.18 5.08,27.89 D2.2 | 2.44,20.27 4.65,20.27 J2.7 | R11.2 27.05,50.44 26.29,49.68 C23.2 26.24,49.66 22.12,49.66 | IC2.2 15.85,20.73 15.85,25.68 18.29,28.12 19.2,28.12 C7.2 19.43,31.7 15.47,35.66 Q4.1 15.24,35.89 6.91,35.89 5.31,37.49 4.12,37.49 3.89,37.57 | v19.43,41.76 19.43,42.67 R9.1 19.51,42.98 19.51,44.55 22.3,47.35 22.3,49.48 22.12,49.66 | 51.79,27.43 49.53,27.43 49.45,27.36 C18.2 49.15,27.36 44.96,27.36 44.81,27.51 C12.2 | 51.79,27.43 53.34,27.43 D9.1 | C12.2 44.58,27.58 43.84,27.58 42.52,26.26 42.52,23.62 D12.1 42.5,22.92 40.95,21.36 40.95,17.45 | C19.2 41.45,32.92 41.45,30.63 44.27,27.81 C12.2 | 51.79,27.43 51.79,24.31 54.32,21.78 D10.1 53.53,21.78 52.32,20.57 52.32,16.76 53.47,15.62 C29.2 55.63,15.39 59.66,11.35 v59.66,11.12 | 18.44,11.43 18.44,9.68 24.49,2.9 | 18.44,11.43 18.44,12.57 | S1.1 24.64,3.08 24.66,3.06 24.66,3.07 26.3,3.07 29.54,6.32 S2.1 29.64,7.32 29.64,8.91 33.22,12.5 | 40.95,17.45 37.34,17.45 37.19,17.3 LED1.4 36.96,17.37 35.66,17.37 LED1.3 35.43,17.3 35.2,17.53 33.38,17.53
  Top 0.508: 40.95,17.45 43.2,17.45 D11.1 | 33.38,17.53 31.62,17.53 R3.2 30.91,17.55 30.1,18.36 30.1,21.21 31.5,22.61 31.5,25.15 31.11,25.53 29.34,25.53 28.35,24.54 R8.2 | 33.38,17.53 33.38,12.72 | J2.6 4.8,15.09 4.8,10.92 8.69,7.03 11.09,7.03 15.42,11.35 18.21,11.35 18.44,11.43 | v64.75,13.49 65.36,14.11 65.36,15.15 65.36,15.21 | ESP32.39 ESP32.42 ESP32.45 56.35,45.25 53.75,47.85 52.59,47.85 ESP32.15 51.83,47.72 51.07,47.72 49.07,45.72 43.66,45.72 | ESP32.39 ESP32.40 ESP32.43 | ESP32.43 ESP32.46 ESP32.47 | ESP32.43 ESP32.44 ESP32.41 69.8,35.87 69.8,33.86 ESP32.38 79.49,33.92 81.41,32 81.41,20.61 78.36,17.56 | 22.12,49.66 IC5.2 | 68.81,14.38 69.6,13.59 71.88,13.59 73.66,15.37 73.66,16.26 74.97,17.56 78.36,17.56 | 78.36,17.56 J1.7 | D3.2 2.67,36.11 2.67,36.2
  Bottom 0.381: C9.2 22.86,30.86 v24,32
  Bottom 0.508: C8.2 67.67,7.85 67.67,5.33 C31.2 | C2.2 43.59,5.79 43.59,3.35 C13.2 43.74,3.12 43.74,2.08 44.3,1.52 59.44,1.52 61.65,3.73 C30.2 61.8,3.96 61.8,6.25 C10.2 61.72,6.48 61.57,6.63 61.57,9.32 | 61.57,9.32 C27.2 61.34,11.12 v59.66,11.12 | 61.57,9.32 64.75,9.32 | 67.51,8.08 C8.2 | 64.75,9.32 v64.75,13.49 | 67.93,7.93 C8.2 | C9.2 22.86,30.71 20.42,30.71 15.47,35.66 Q4.1 15.54,35.97 19.43,39.85 v19.43,41.76 | v67.06,22.35 v64.64,22.35 | C8.2 67.64,8.94 67.26,9.32 64.75,9.32
GREENLED  (via drill 0.35)
  Top 0.152: v38.25,35.36 38.25,25.53 R13.2 | v58.27,48.18 57.1,48.18 55.78,49.5 ESP32.12
  Bottom 0.152: v58.27,48.18 56.29,50.16 47.5,50.16 38.25,40.92 v38.25,35.36
INN  (via drill 0.35)
  Top 0.152: 55.97,26.18 55.63,26.52 D9.3 | 55.97,26.18 56.08,26.06 60.12,26.06 R18.2 | 55.97,26.18 55.8,26.01 55.8,20.42 56.41,19.81 56.41,15.29 56.45,15.29 60.45,11.29 v60.45,9.14 | v60.07,4.95 71.12,4.95 75.56,9.4 J1.5
  Bottom 0.152: v60.45,9.14 60.45,5.33 v60.07,4.95
INP
  Top 0.152: D10.3 56.77,20.88 59.59,23.7 59.97,23.7 R24.2 59.97,23.62 60.73,22.86 60.73,14.86 63.86,11.73 68.5,11.73 68.64,11.73 68.71,11.81 78.19,11.81 J1.9
LED_DRV_SUP  (via drill 0.35)
  Top 0.152: IC4.17 67.82,15.24 68.28,15.24 IC4.18 68.31,14.83 67.77,14.29 v67.77,13.89 | D12.2 43.28,20.95 44.3,19.94 44.3,16.69 43.28,15.67 43.28,15.62 D11.2 43.36,15.62 v44.5,15.62 44.5,12.04 50.06,6.48 v64.72,6.48
  Bottom 0.152: v67.77,13.89 68.07,13.89 69.57,12.39 69.57,4.67 68.78,3.89 66.34,3.89 66.06,4.17 66.06,5.33 | 66.06,5.33 C31.1 | 65.99,7.75 65.99,7.24 C8.1 65.99,7.85 65.99,7.75 | v44.5,15.62 49.53,10.59 L1.2 | 65.99,7.75 v64.72,6.48 64.92,6.48 66.06,5.33
N$1
  Top 0.152: R13.1 38.18,23.47 38.18,21.41 37.19,20.42 LED1.2
N$2
  Top 0.152: R14.1 35.2,23.77 35.2,20.65 35.43,20.42 LED1.1
N$3
  Top 0.152: IC4.38 65.76,21.18 65.76,23.77 61.27,28.27 47.78,28.27 44.65,31.39 Y1.1 44.25,31.44 43.05,32.64 43.05,34.29 42.76,34.58 C19.1
N$4
  Top 0.152: R4.2 36.8,43.71 36.42,44.09 33.76,44.09 32.97,44.88 Q1.1
N$5  (via drill 0.35)
  Top 0.152: R5.2 34.36,46.18 v32.05,46.18 | v25.45,45.03 24.31,45.03 Q2.1
  Bottom 0.152: v32.05,46.18 26.59,46.18 v25.45,45.03
N$6
  Top 0.152: R9.2 17.91,42.98 17.91,48.46 18.14,48.69 IC5.5
N$7  (via drill 0.35)
  Top 0.152: IC4.37 66.37,21.18 v66.37,23.24 | v50.06,33.22 49.23,33.22 Y1.3 49.05,34.28 49.05,44.45 48.28,45.21 44.91,45.21 44.5,44.81 44.5,43.05 45.34,42.22 45.34,41.45 C20.1
  Bottom 0.152: v66.37,23.24 60.05,23.24 v50.06,33.22
N$8  (via drill 0.35)
  Top 0.152: v63.09,16.84 63.63,17.37 64.08,17.37 IC4.7
  Bottom 0.152: v63.09,16.84 63.09,11.05 C27.1
N$9
  Top 0.152: IC4.1 63.58,20.67 63.58,24.21 61.8,25.98 R18.1
N$10
  Top 0.152: IC4.2 64.08,19.96 63.63,19.96 62.33,21.26 62.33,23.01 61.65,23.7 R24.1
N$11
  Top 0.152: IC4.14 66.29,15.16 66.29,12.72 66.06,12.5 R26.1
N$12
  Top 0.152: C29.1 57.23,15.62 57.23,18.67 59.97,21.41 R25.2
N$13
  Top 0.152: IC4.15 66.83,15.16 66.83,13.26 67.59,12.5 67.89,12.5 R27.1
N$14
  Top 0.152: R15.1 38.48,36.65 21.57,36.65 Q4.3
N$15
  Top 0.152: Q4.2 17.98,35.74 16.76,36.96 8.64,36.96 5.33,40.26 2.79,40.26 2.23,40.83 R19.1
N$16
  Top 0.152: R3.1 32.13,19.54 32.13,25.32 30.79,26.67 30.79,27.2 IC3.11
N$17
  Top 0.152: R7.1 22.86,25.53 28.5,25.53 29.72,26.75 29.72,27.2 IC3.9
N$18  (via drill 0.35)
  Top 0.152: v19.81,24.46 18.14,24.46 R10.2 | IC3.8 29.18,27.2 v28.5,26.52 28.35,26.36 22.48,26.36 22.1,25.98 22.1,24.99 22.33,24.77 26.29,24.77 27.91,23.14 29.57,23.14 29.88,23.46 R8.1
  Bottom 0.152: v19.81,24.46 26.44,24.46 v28.5,26.52
N$19
  Top 0.152: LED2.1 8.84,49.99 9.37,49.99 13.72,45.63 R20.1
N$20
  Top 0.152: S3.1 10.79,9.02 12.06,9.02 15.75,12.7 15.75,13.72 17.27,15.24 20.7,15.24 25.4,19.94 D5.2
N$21  (via drill 3)
  other vias: 81.66,49.91
N$23  (via drill 3)
  other vias: 4.06,49.91
N$25
  Top 0.152: R16.2 3.96,44.96 3.96,44.2 4.47,43.69 | Q3.1 7.73,43.69 4.47,43.69 | 4.47,43.69 4.12,43.34 R19.2
N$26
  Top 0.152: IC5.1 20.65,48.77 19.89,48.77 19.36,49.3 17.07,49.3 15.77,48.01 15.77,45.7 R20.2
N$28
  Top 0.152: LED2.2 8.13,48.8 8.13,47.98 10.36,45.74 10.36,43.2 Q3.3 | IC5.4 17.65,51.38 8.71,51.38 7.32,49.99 LED2.2 | C22.1 2.13,38.86 2.13,39.83 1.14,40.82 1.14,46.28 2.11,47.24 6.35,47.24 7.2,48.09 LED2.2
REDLED  (via drill 0.35)
  Top 0.152: v35.2,30.63 35.2,25.76 R14.2 | v49.28,49.02 49.28,50.55 51.18,52.45 56.13,52.45 57.05,51.53 ESP32.11
  Bottom 0.152: v35.2,30.63 47.88,43.31 47.88,47.62 v49.28,49.02
RTS
  Top 0.152: 38.73,41.27 36.6,41.27 36.09,41.78 36.09,43.33 35.74,43.69 33.43,43.69 32.66,42.93 29.32,42.93 Q1.2 | R5.1 36.96,45.03 36.96,44.25 37.81,43.4 37.81,42.2 38.73,41.27 | 38.73,41.27 39.29,40.72 39.29,36.32 38.94,35.97 34.75,35.97 31.24,32.46 31.24,32 IC3.24
RX_ANA_SUP  (via drill 0.35)
  Top 0.152: IC4.33 68.28,21.11 68.28,20.65 68.05,20.42 65.53,20.42 65.38,20.57 65.38,21.11 IC4.39 65.3,21.18 65.3,23.77 61.7,27.38 54.81,27.38 53.38,25.95 D9.2 53.42,25.53 53.42,24.69 53.42,24.38 | 53.42,24.38 53.42,24.31 v53.57,24.31 | 53.42,24.38 55.45,22.35 55.45,20.78 54.56,19.89 D10.2 | C12.1 44.58,25.91 44.73,25.76 49.38,25.76 C18.1 49.45,25.68 v49.45,24.69 v49.45,8.46
  Bottom 0.152: v49.45,8.46 49.45,4.72 L4.2 | v53.57,24.31 49.84,24.31 v49.45,24.69
RX_DIG_SUP  (via drill 0.35)
  Top 0.152: C26.1 45.19,47.4 45.19,50.14 C11.1 45.11,50.22 43.74,51.59 42.9,51.59 42.62,51.31 42.62,40.18 42.93,39.88 43.69,39.88 44.58,38.99 45.24,38.99 v45.9,39.65 | v68.89,20.12 69.27,20.5 69.27,21.11 IC4.31
  Bottom 0.152: v45.9,39.65 45.9,38.81 44.35,37.26 44.35,36.65 61.38,19.62 65.6,19.62 66.09,20.12 v68.89,20.12 68.83,20.12 68.83,20.07 67.82,19.05 60.81,19.05 55.17,13.41 55.17,10.8 L3.2
RXD  (via drill 0.35)
  Top 0.152: v32,34.14 32,33.76 30.79,32.54 30.79,32 IC3.25 | R2.2 68.58,27.34 v68.58,28.83
  Bottom 0.152: v32,34.14 37.95,34.14 43.05,39.24 43.05,44.32 48.39,49.66 50.55,49.66 68.45,31.75 68.58,31.75 v68.58,28.83
RXD0  (via drill 0.35)
  Top 0.152: v55.6,39.24 59.41,39.24 62.33,36.32 63.5,36.32 64.67,35.15 ESP32.34 | R1.1 36.45,30.23 36.83,29.84 v37.36,29.84
  Bottom 0.152: v37.36,29.84 37.36,32.16 46.23,41.02 53.82,41.02 v55.6,39.24
SENSOR_VN
  Top 0.152: 28.57,51.51 28.57,50.22 29.34,49.45 R12.1 | 28.57,51.51 28.57,51.82 R11.1 | 28.57,51.51 R11.1 | R11.1 29.63,52.88 63.48,52.88 64.67,51.69 ESP32.5
SPI_CS0  (via drill 0.35)
  Top 0.152: v71.27,19.3 70.94,18.97 70.03,18.97 IC4.27 | v55.02,37.85 54.89,37.97 ESP32.23
  Bottom 0.152: v71.27,19.3 71.27,21.59 v55.02,37.85
SPI_MISO  (via drill 0.35)
  Top 0.152: v72.49,18.64 71.83,17.98 70.03,17.98 IC4.25 | v55.78,47.42 55.78,47.55 53.24,50.09 ESP32.14
  Bottom 0.152: v72.49,18.64 72.49,29.31 55.78,46.02 v55.78,47.42
SPI_MOSI  (via drill 0.35)
  Top 0.152: v71.88,21.06 71.88,19 71.32,18.44 70.03,18.44 IC4.26 | v54.71,43.51 54.23,43.99 54.23,45.85 53.21,46.86 ESP32.16
  Bottom 0.152: v71.88,21.06 71.88,22.61 57.66,36.83 57.66,40.64 55.19,43.1 v54.71,43.51
SPI_SCK  (via drill 0.35)
  Top 0.152: v72.47,17.45 70.03,17.45 IC4.24 | v57.58,46.79 57.58,46.81 54.51,49.88 ESP32.13
  Bottom 0.152: v72.47,17.45 72.47,17.58 73.23,18.34 73.23,31.14 v57.58,46.79
TX_CTRL_SUP  (via drill 0.35)
  Top 0.152: v61.34,15.16 64.77,15.16 IC4.11
  Bottom 0.152: C10.1 63.4,6.48 63.4,3.96 C30.1 64.15,3.2 68.94,3.2 70.26,4.52 70.26,12.95 65.76,17.45 62.79,17.45 61.34,16 v61.34,15.16 60.15,13.97 57.15,13.97 56.39,13.21 56.39,5.53 L2.2
TXD  (via drill 0.35)
  Top 0.152: v33.22,33.53 36.42,33.53 R1.2 | v30.86,33.53 30.86,33.07 30.25,32.46 30.25,32 IC3.26
  Bottom 0.152: v30.86,33.53 v33.22,33.53
TXD0
  Top 0.152: R2.1 65.94,28.38 ESP32.35
TXN  (via drill 0.35)
  Top 0.152: v57.84,16.99 59.55,15.28 | 59.55,15.28 63.93,10.9 65.99,10.9 R26.2 | v47.19,15.44 46.86,15.44 D11.3 | 59.55,15.28 v60.05,15.77 | J1.3 75.56,16.1 72.26,12.8 v70.87,12.8
  Bottom 0.152: v57.84,16.99 48.74,16.99 v47.19,15.44 | v70.87,12.8 65.91,17.75 62.03,17.75 v60.05,15.77
TXP  (via drill 0.35)
  Top 0.152: D12.3 45.49,21.95 45.49,18.44 48.84,15.09 48.84,8.15 49.15,7.85 68.02,7.85 v68.94,8.76 67.97,9.73 67.97,10.9 R27.2 68.29,10.54 v71.63,10.54
  Bottom 0.152: v71.63,10.54 73.53,12.45 73.53,17.27 75.21,18.95 J1.2
USB_DN  (via drill 0.35)
  Top 0.152: D2.1 5.67,35.6 5.89,35.38 5.89,21.82 v5.64,21.57 | v6.33,18.36 5.11,18.36 J2.2 | v24.16,28.73 24.46,29.03 28.35,29.03 IC3.5
  Bottom 0.152: v5.64,21.57 5.64,19.05 v6.33,18.36 6.33,18.44 17.22,18.44 18.14,19.36 18.14,23.7 19.51,25.07 20.5,25.07 v24.16,28.73
USB_DP  (via drill 0.35)
  Top 0.152: v3.2,29.57 3.2,34.47 D3.1 | v3.81,17.68 4.95,17.68 5.03,17.75 J2.3 | v20.88,28.65 21.79,29.57 28.35,29.57 IC3.4
  Bottom 0.152: v3.2,29.57 3.81,28.96 3.81,24.54 | v3.81,17.68 3.81,24.54 | v20.88,28.65 16.76,24.54 3.81,24.54
VCM
  Top 0.152: IC4.4 64.08,18.97 63.55,18.97 61.65,20.88 61.65,21.41 R25.1

## Text on the board
_tsilk: Spo2 / James Utke